# EAGLE board Board_OpenBook (EAGLE 9.7.0)
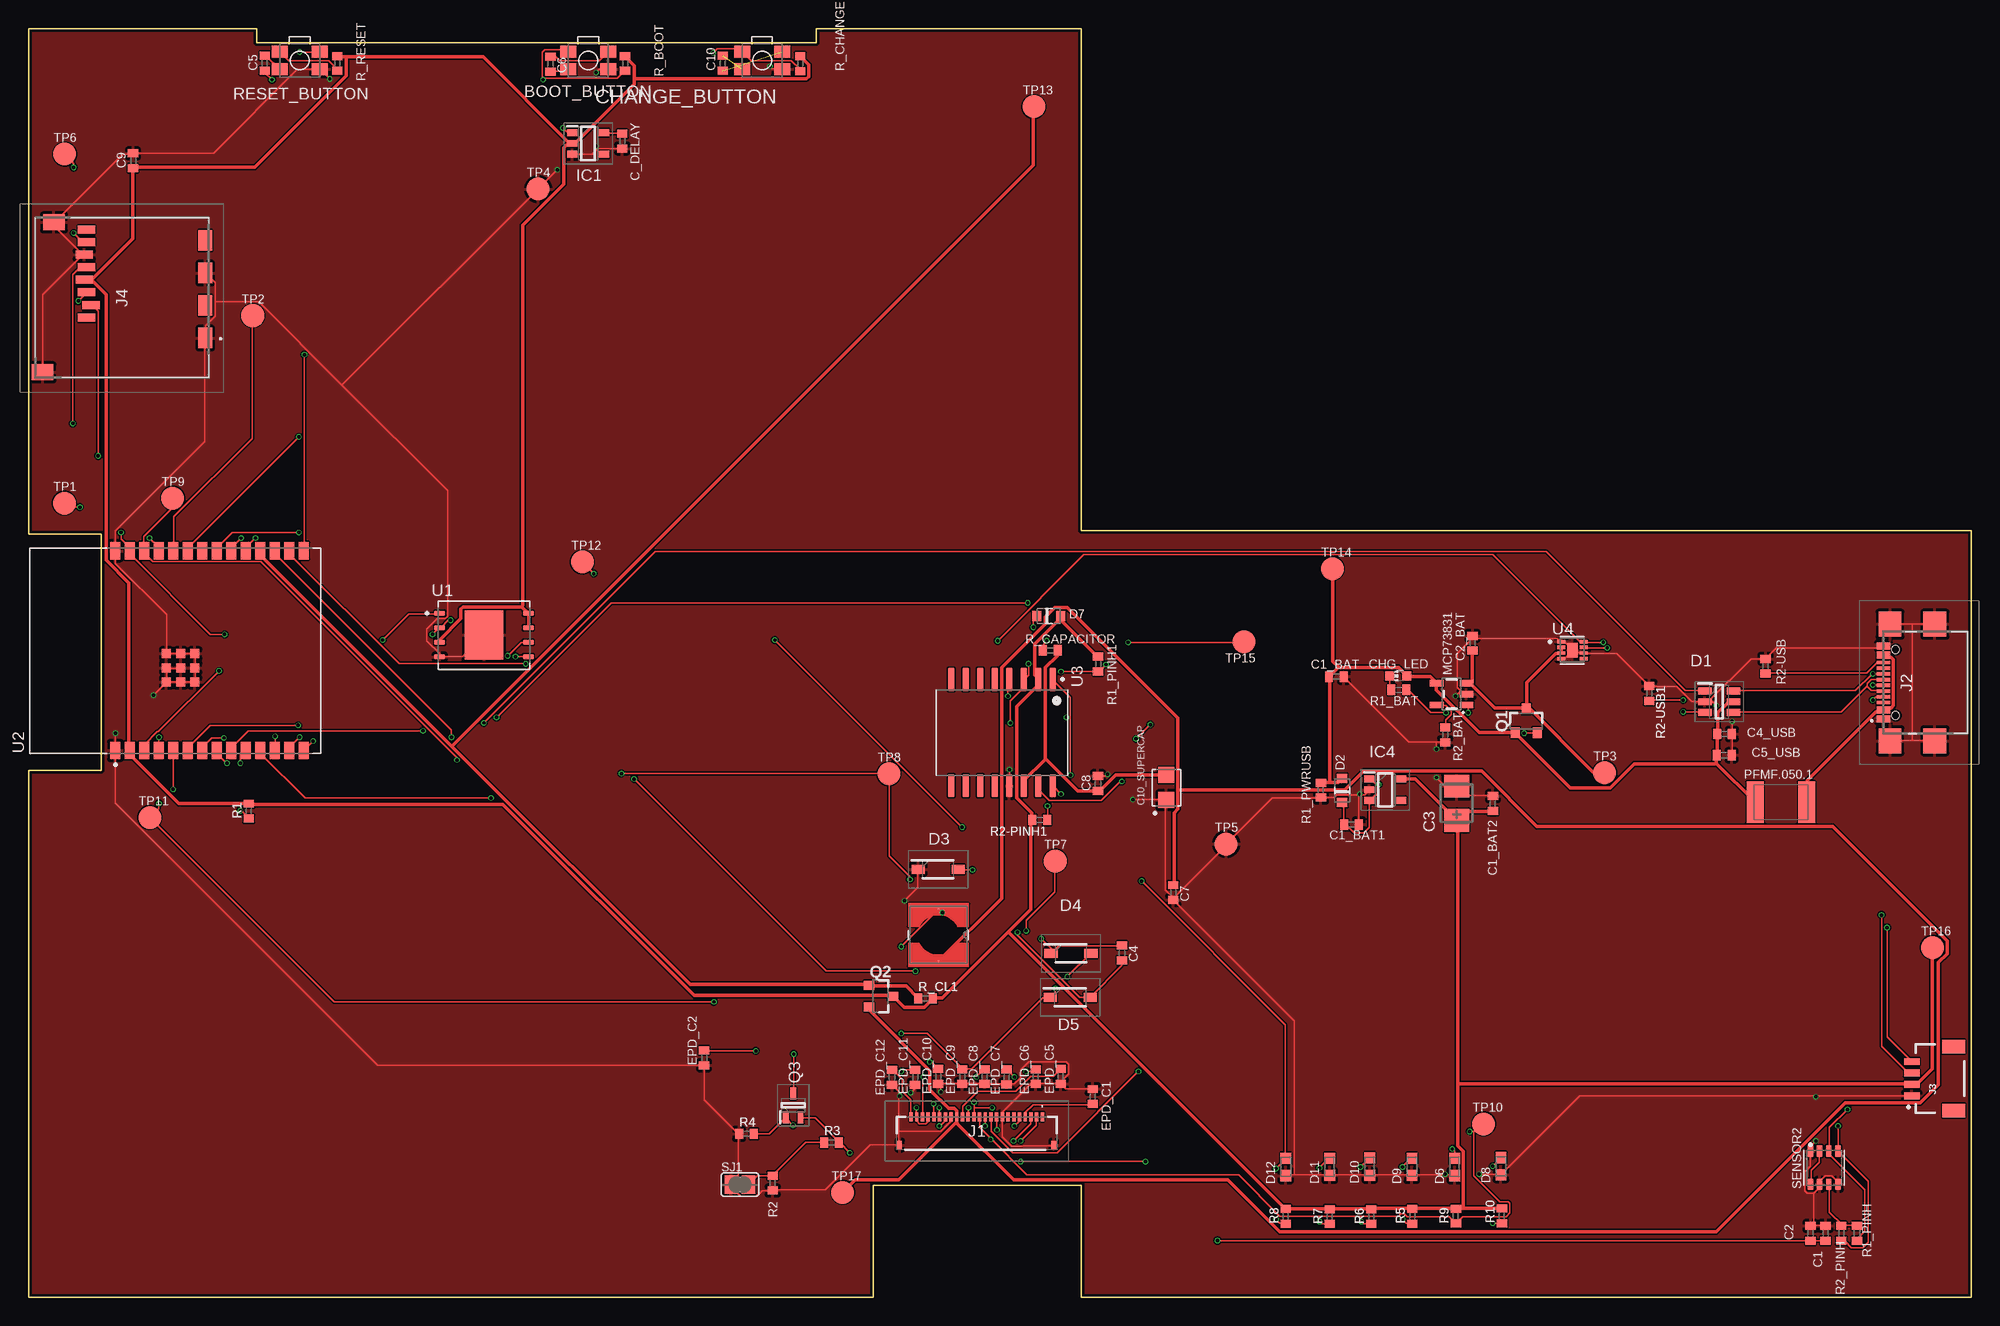
[diagram p0: board, top side]
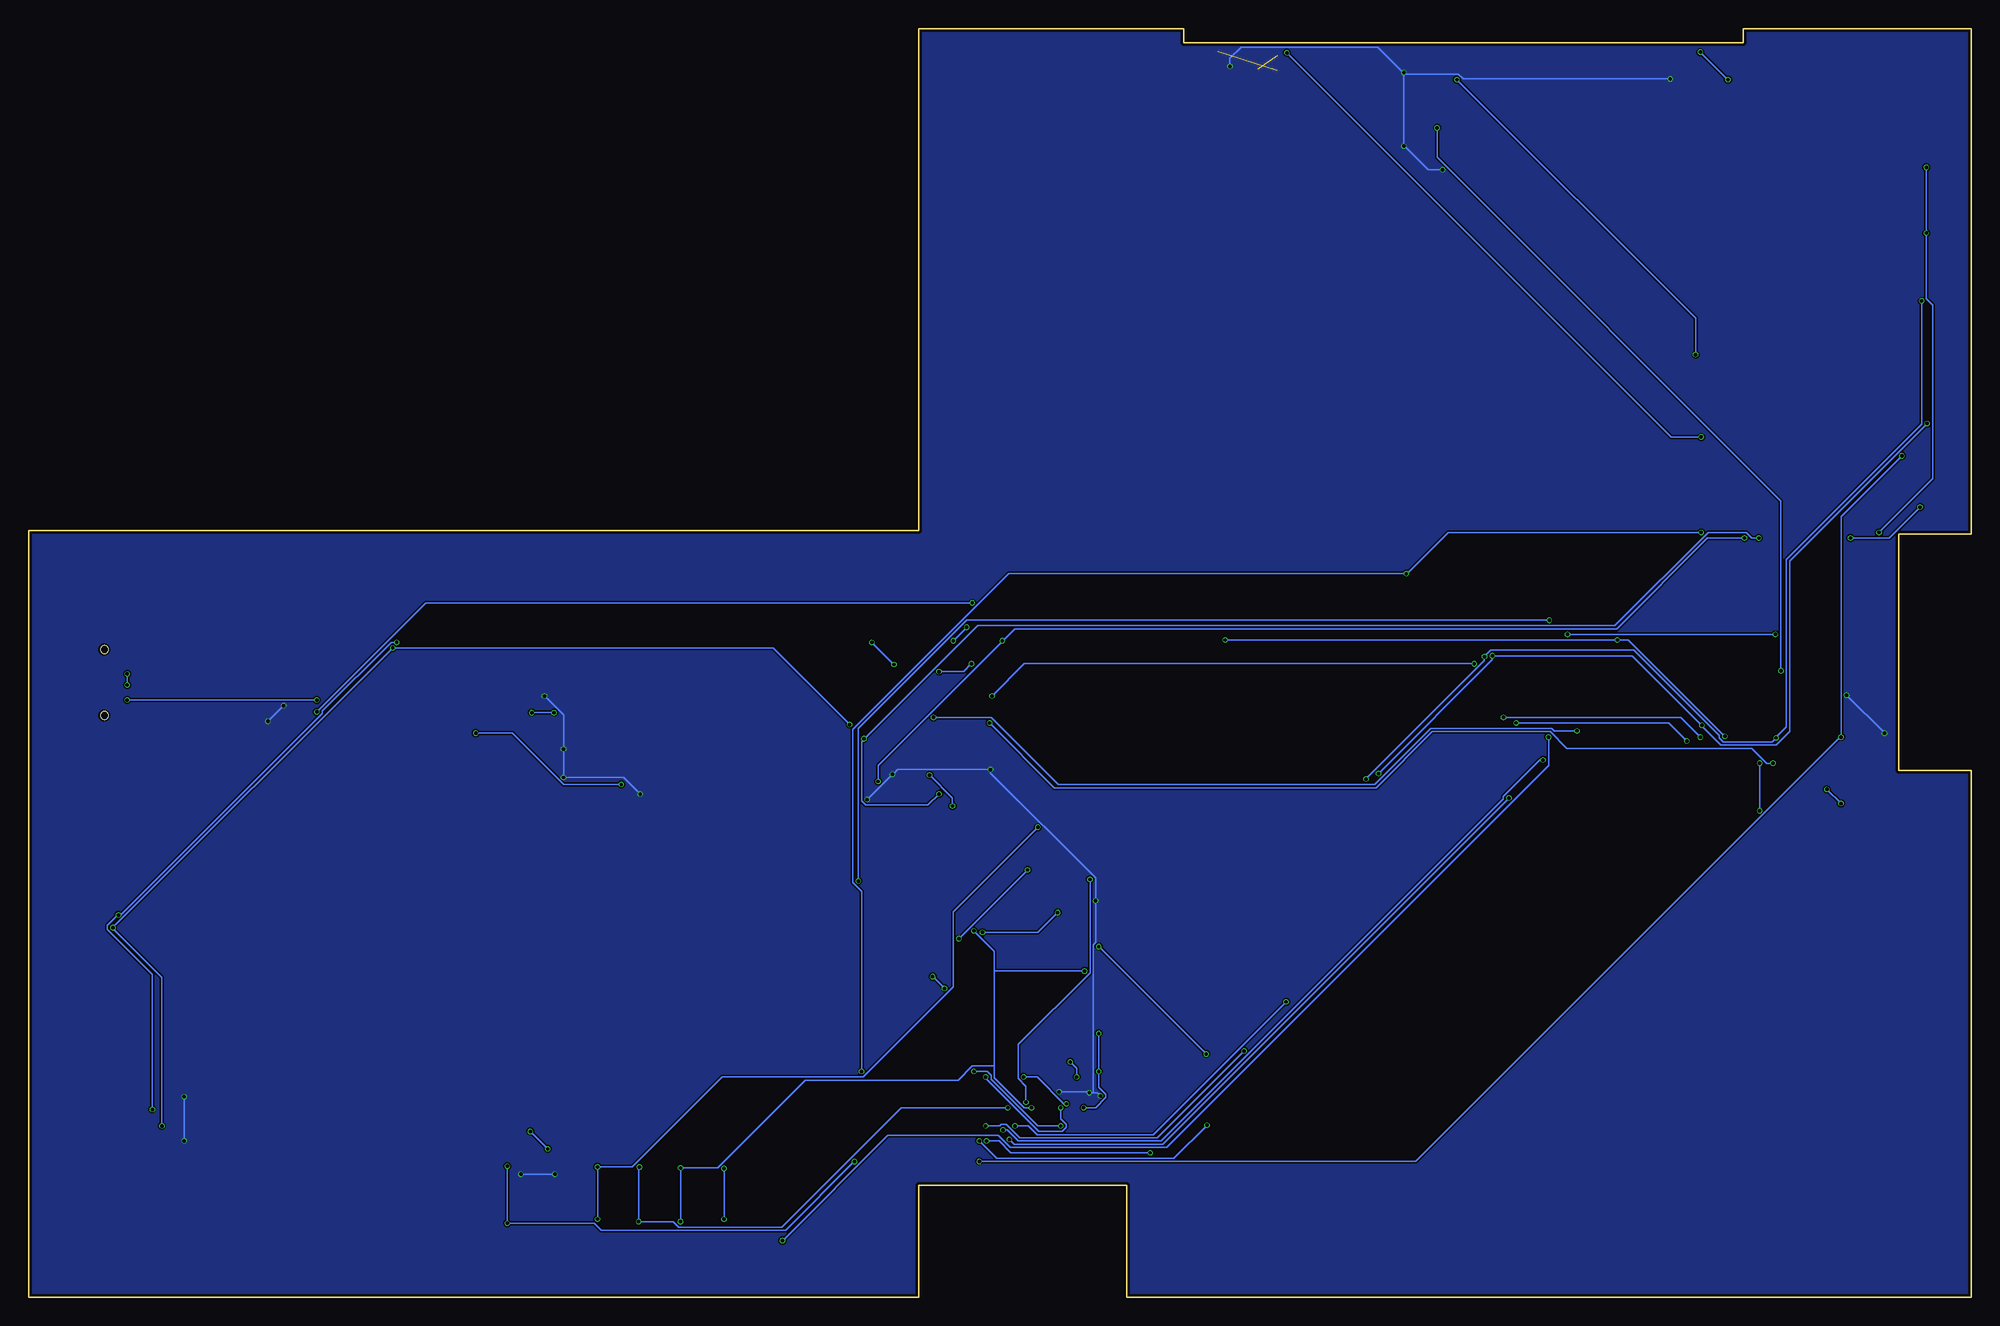
[diagram p1: board, bottom side, seen from below]

Size 170.2 x 111.2 mm. Coordinates in mm from the lower left corner, seen from the top.
Outline: 0,0 74,0 74,9.85 92.2,9.85 92.2,0 170.2,0 170.2,67.2 92.2,67.2 92.2,111.2 69.02,111.2 69.02,109.95 19.97,109.95 19.97,111.2 0,111.2 0,66.9 6.35,66.9 6.35,46.19 0,46.19 0,0
Copper layers (1*16): Top 0.035mm / dielectric 1.6mm / Bottom 0.035mm
Design rules "jlcpcb-2layers.dru": minimum track width 5mil, minimum drill 0.3mm, track to track 5mil, track to pad 5mil, pad to pad 5mil, via to via 5mil, smd to smd 5mil, copper to edge 0.2mm, drill to drill 6mil, minimum pad ring 10mil, minimum via ring 3mil, stop-mask expansion 4mil, vias tented up to drill 0mil, thermal gap 10mil
Net classes: 0 default: width 0.15 mm; 1 POWER: width 0.3 mm

## Footprints (pad centres in the part's own frame; a part is rotated, then mirrored left to right if it is on the bottom)
MYBUTTON = smd 1.4 x 1.05: 1 1.75,0.75; 2 -1.75,0.75; 3 -1.75,-0.75; 4 1.75,-0.75
ESP32_WROVER_EAGLE-LTSPICE_C0402 = smd 0.7 x 0.9: 1 -0.65,0; 2 0.65,0
RCL_CT3528 = smd 2 x 2.2: + -1.5,0; - 1.5,0
CAPCP3225X100N = smd 1.4 x 1.4: 1 -1.1,0; 2 1.1,0
ADAFRUIT_CHIP-LED0603 = smd 0.8 x 0.8: A 0,-0.75; C 0,0.75
SOT95P280X145-6N = smd 1.2 x 0.6: 1 -1.25,0.95; 2 -1.25,0; 3 -1.25,-0.95; 4 1.25,-0.95; 5 1.25,0; 6 1.25,0.95
ESP32_WROVER_AVX---SD0805S020S1R0_AVX_SD0805S020S1R0_0 = smd 0.8 x 0.9: 1 -1.05,0; 2 1.05,0
SOD3716X135N = smd 1.15 x 0.8: 1 -1.75,0; 2 1.75,0
DIOC1608X36N = smd 0.97 x 0.94: 1 -0.75,0; 2 0.75,0
SOT95P280X120-5N = smd 0.9 x 0.6: 1 -1.4,0.95; 2 -1.4,0; 3 -1.4,-0.95; 4 1.4,-0.95; 5 1.4,0.95
FH34SRJ24S05SH99 = smd 0.3 x 0.8: 1 5.75,1.45; 2 5.25,1.45; 3 4.75,1.45; 4 4.25,1.45; 5 3.75,1.45; 6 3.25,1.45; 7 2.75,1.45; 8 2.25,1.45; 9 1.75,1.45; 10 1.25,1.45; 11 0.75,1.45; 12 0.25,1.45; 13 -0.25,1.45; 14 -0.75,1.45; 15 -1.25,1.45; 16 -1.75,1.45; 17 -2.25,1.45; 18 -2.75,1.45; 19 -3.25,1.45; 20 -3.75,1.45; 21 -4.25,1.45; 22 -4.75,1.45; 23 -5.25,1.45; 24 -5.75,1.45 | smd 0.4 x 0.8: MP1 6.75,-1.05; MP2 -6.75,-1.05
SAMACSYS_PARTS_USB4110GFA = smd 0.3 x 1.15: A1 -3.35,3.678; A4 -2.55,3.678; A5 -1.25,3.678; A6 -0.25,3.678; A7 0.25,3.678; A8 1.25,3.678; A9 2.55,3.678; A12 3.35,3.678; B1 3.05,3.678; B4 2.25,3.678; B5 1.75,3.678; B6 0.75,3.678; B7 -0.75,3.678; B8 -1.75,3.678; B9 -2.25,3.678; B12 -3.05,3.678 | smd 2.18 x 2: MP1 -5.11,-0.827; MP2 5.11,-0.827; MP3 -5.11,3.103; MP4 5.11,3.103 | hole 0.65: -2.89,2.603; 2.89,2.603
JST04_1MM_RA = smd 0.6 x 1.35: 1 -1.5,0; 2 -0.5,0; 3 0.5,0; 4 1.5,0 | smd 1.2 x 2: NC1 2.8,-3.675; NC2 -2.8,-3.675
112ATAARR03ATTEND = smd 1.8 x 1.2: G1 10.6,10.4; G2 4.9,10.4; S1 7.75,10.4; S2 2.05,10.4 | smd 1.4 x 1.9: G3 13.6,-3.85; G4 0.45,-2.85 | smd 0.7 x 1.5: P1 8.8,0; P2 7.7,0.4; P3 6.6,0; P4 5.5,-0.2; P5 4.4,0; P6 3.3,-0.2; P7 2.2,0; P8 1.1,0
IND_4828-WE-TPC_WRE = smd 0.127 x 0.127: 1 -2.286,0; 2 2.286,0
ESP32_WROVER_SPARKFUN-IC-POWER_SOT23-5 = smd 0.55 x 1.2: 1 -0.95,-1.3; 2 0,-1.3; 3 0.95,-1.3; 4 0.95,1.3; 5 -0.95,1.3
ESP32C6_VARISTOR_CT/CN1812 = smd 1.5 x 3.6: 1 -2.25,0; 2 2.25,0
ESP32_WROVER_SPARKFUN-DISCRETESEMI_SOT23-3 = smd 0.8 x 0.9: 1 -0.95,-1; 2 0.95,-1; 3 0,1.1
SOT65P210X110-3N = smd 1.05 x 0.5: 1 -1.05,0.65; 2 -1.05,-0.65; 3 1.05,0
ESP32_WROVER_EAGLE-LTSPICE_R0402 = smd 0.7 x 0.9: 1 -0.65,0; 2 0.65,0
ESP32_WROVER_BME680_PSON80P300X300X100-8N = smd 1.016 x 0.5: 1 1.458,1.2; 2 1.458,0.4; 3 1.458,-0.4; 4 1.458,-1.2; 5 -1.458,-1.22; 6 -1.458,-0.4; 7 -1.458,0.4; 8 -1.458,1.2
SJ = smd 1.168 x 1.6: 1 -0.762,0; 2 0.762,0
TP20R = smd 2 x 2: TP 0,0
SON127P600X800X80-9N = smd 0.94 x 0.44: 1 -3.895,1.905; 2 -3.895,0.635; 3 -3.895,-0.635; 4 -3.895,-1.905; 5 3.895,-1.905; 6 3.895,-0.635; 7 3.895,0.635; 8 3.895,1.905 | smd 3.4 x 4.3: 9 0,0
XCVR_ESP32-C6-WROOM-1-N8 = smd 1.5 x 0.9: 1 -8.75,5.26; 2 -8.75,3.99; 3 -8.75,2.72; 4 -8.75,1.45; 5 -8.75,0.18; 6 -8.75,-1.09; 7 -8.75,-2.36; 8 -8.75,-3.63; 9 -8.75,-4.9; 10 -8.75,-6.17; 11 -8.75,-7.44; 12 -8.75,-8.71; 13 -8.75,-9.98; 14 -8.75,-11.25; 15 8.75,-11.25; 16 8.75,-9.98; 17 8.75,-8.71; 18 8.75,-7.44; 19 8.75,-6.17; 20 8.75,-4.9; 21 8.75,-3.63; 22 8.75,-2.36; 23 8.75,-1.09; 24 8.75,0.18; 25 8.75,1.45; 26 8.75,2.72; 27 8.75,3.99; 28 8.75,5.26 | smd 0.8 x 0.8: 29_1 -2.755,0.79; 29_2 -1.505,0.79; 29_3 -0.255,0.79; 29_4 -2.755,-0.46; 29_5 -1.505,-0.46; 29_6 -0.255,-0.46; 29_7 -2.755,-1.71; 29_8 -1.505,-1.71; 29_9 -0.255,-1.71
SOIC127P1032X265-16N = smd 2.05 x 0.59: 1 -4.655,4.445; 2 -4.655,3.175; 3 -4.655,1.905; 4 -4.655,0.635; 5 -4.655,-0.635; 6 -4.655,-1.905; 7 -4.655,-3.175; 8 -4.655,-4.445; 9 4.655,-4.445; 10 4.655,-3.175; 11 4.655,-1.905; 12 4.655,-0.635; 13 4.655,0.635; 14 4.655,1.905; 15 4.655,3.175; 16 4.655,4.445
SON50P200X200X80-9N = smd 0.76 x 0.27: 1 -0.985,0.75; 2 -0.985,0.25; 3 -0.985,-0.25; 4 -0.985,-0.75; 5 0.985,-0.75; 6 0.985,-0.25; 7 0.985,0.25; 8 0.985,0.75 | smd 0.9 x 1.3: 9 0,0

## Placement (x,y rotation side)
BOOT_BUTTON  BUTTON_CUSYOMV1  [MYBUTTON]  49.03,108.4 180 top
C1  100nF  [ESP32_WROVER_EAGLE-LTSPICE_C0402]  157.42,5.63 90 top
C1_BAT  4.7uF  [ESP32_WROVER_EAGLE-LTSPICE_C0402]  114.57,54.4 0 top
C1_BAT1  4.7uF  [ESP32_WROVER_EAGLE-LTSPICE_C0402]  115.89,41.44 0 top
C1_BAT2  4.7uF  [ESP32_WROVER_EAGLE-LTSPICE_C0402]  128.28,43.28 90 top
C2  100nF  [ESP32_WROVER_EAGLE-LTSPICE_C0402]  156.1,5.63 90 top
C2_BAT  4.7uF  [ESP32_WROVER_EAGLE-LTSPICE_C0402]  126.5,57.33 90 top
C3  100uF TANT  [RCL_CT3528]  125.1,43.31 90 top
C4  4.7uF/25V  [ESP32_WROVER_EAGLE-LTSPICE_C0402]  95.79,30.19 270 top
C4_USB  100nF  [ESP32_WROVER_EAGLE-LTSPICE_C0402]  148.57,49.37 0 top
C5  1uF  [ESP32_WROVER_EAGLE-LTSPICE_C0402]  20.69,108.16 90 top
C5_USB  4.7uF  [ESP32_WROVER_EAGLE-LTSPICE_C0402]  148.53,47.52 0 top
C6  100nF  [ESP32_WROVER_EAGLE-LTSPICE_C0402]  45.72,108.08 270 top
C7  10uF  [ESP32_WROVER_EAGLE-LTSPICE_C0402]  100.28,35.48 270 top
C8  100nF  [ESP32_WROVER_EAGLE-LTSPICE_C0402]  93.68,45.03 90 top
C9  100nF  [ESP32_WROVER_EAGLE-LTSPICE_C0402]  9.16,99.61 90 top
C10  100nF  [ESP32_WROVER_EAGLE-LTSPICE_C0402]  60.81,108.15 90 top
C10_SUPERCAP  CPH3225A  [CAPCP3225X100N]  99.68,44.68 90 top
C_DELAY  100nF  [ESP32_WROVER_EAGLE-LTSPICE_C0402]  52,101.33 270 top
CHANGE_BUTTON  BUTTON_CUSYOMV1  [MYBUTTON]  64.26,108.4 180 top
CHG_LED  [ADAFRUIT_CHIP-LED0603]  119.98,54.46 90 top
D1  USBLC6-2SC6Y  [SOT95P280X145-6N]  148.1,52.2 0 top
D2  ESP32_WROVER_AVX---SD0805S020S1R0_AVX_SD0805S020S1R0_0_0AVX_SD0805S020S1R0_0_0  [ESP32_WROVER_AVX---SD0805S020S1R0_AVX_SD0805S020S1R0_0]  115.07,44.43 90 top
D3  MBR0530  [SOD3716X135N]  79.68,37.51 0 top
D4  MBR0530  [SOD3716X135N]  91.32,30.16 0 top
D5  MBR0530  [SOD3716X135N]  91.25,26.29 0 top
D6  PGB1010603MR  [DIOC1608X36N]  124.93,11.43 90 top
D7  ESP32_WROVER_AVX---SD0805S020S1R0_AVX_SD0805S020S1R0_0_0AVX_SD0805S020S1R0_0_0  [ESP32_WROVER_AVX---SD0805S020S1R0_AVX_SD0805S020S1R0_0]  89.37,59.72 0 top
D8  PGB1010603MR  [DIOC1608X36N]  128.98,11.51 90 top
D9  PGB1010603MR  [DIOC1608X36N]  121.18,11.44 90 top
D10  PGB1010603MR  [DIOC1608X36N]  117.48,11.47 90 top
D11  PGB1010603MR  [DIOC1608X36N]  113.98,11.45 90 top
D12  PGB1010603MR  [DIOC1608X36N]  110.13,11.43 90 top
EPD_C1  1uF/50V  [ESP32_WROVER_EAGLE-LTSPICE_C0402]  93.22,17.61 270 top
EPD_C2  1uF/50V  [ESP32_WROVER_EAGLE-LTSPICE_C0402]  59.18,21 90 top
EPD_C5  0.1uF/50V  [ESP32_WROVER_EAGLE-LTSPICE_C0402]  90.42,19.38 90 top
EPD_C6  1uF/50V  [ESP32_WROVER_EAGLE-LTSPICE_C0402]  88.23,19.35 90 top
EPD_C7  1uF/50V  [ESP32_WROVER_EAGLE-LTSPICE_C0402]  85.68,19.32 90 top
EPD_C8  1uF/50V  [ESP32_WROVER_EAGLE-LTSPICE_C0402]  83.75,19.35 90 top
EPD_C9  1uF/50V  [ESP32_WROVER_EAGLE-LTSPICE_C0402]  81.8,19.36 90 top
EPD_C10  1uF/50V  [ESP32_WROVER_EAGLE-LTSPICE_C0402]  79.68,19.37 90 top
EPD_C11  1uF/50V  [ESP32_WROVER_EAGLE-LTSPICE_C0402]  77.66,19.3 90 top
EPD_C12  1uF/50V  [ESP32_WROVER_EAGLE-LTSPICE_C0402]  75.64,19.3 90 top
IC1  XC6220A331MR-G  [SOT95P280X120-5N]  49.02,101.13 0 top
IC4  XC6220A331MR-G  [SOT95P280X120-5N]  118.85,44.49 0 top
J1  FH34SRJ-24S-0.5SH_99_  [FH34SRJ24S05SH99]  83.06,14.39 0 top
J2  SAMACSYS_PARTS_USB4110-GF-A  [SAMACSYS_PARTS_USB4110GFA]  166.17,53.89 90 top
J3  QWIIC_RIGHT_ANGLE  [JST04_1MM_RA]  164.97,19.17 90 top
J4  112A-TAAR-R03_ATTEND  [112ATAARR03ATTEND]  5.08,94.68 270 top
L1  68uH  [IND_4828-WE-TPC_WRE]  79.71,31.77 270 top
MCP73831  ESP32_WROVER_SPARKFUN-IC-POWER_MCP73831  [ESP32_WROVER_SPARKFUN-IC-POWER_SOT23-5]  124.66,52.87 90 top
PFMF.050.1  ESP32C6_VARISTORCN1812  [ESP32C6_VARISTOR_CT/CN1812]  153.51,43.4 180 top
Q1  20V/4.2A/52mΩ/1.4W  [ESP32_WROVER_SPARKFUN-DISCRETESEMI_SOT23-3]  131.2,50.5 0 top
Q2  20V/4.2A/52mΩ/1.4W  [ESP32_WROVER_SPARKFUN-DISCRETESEMI_SOT23-3]  74.63,26.4 270 top
Q3  SI1308EDL-T1-GE3  [SOT65P210X110-3N]  66.98,16.83 90 top
R1  10K  [ESP32_WROVER_EAGLE-LTSPICE_R0402]  19.3,42.62 90 top
R1_BAT  200  [ESP32_WROVER_EAGLE-LTSPICE_R0402]  120.04,53.25 0 top
R1_PINH  10K  [ESP32_WROVER_EAGLE-LTSPICE_R0402]  160.17,5.62 90 top
R1_PINH1  10K  [ESP32_WROVER_EAGLE-LTSPICE_R0402]  93.69,55.51 90 top
R1_PWRUSB  100K  [ESP32_WROVER_EAGLE-LTSPICE_R0402]  113.21,44.45 90 top
R2  2.2  [ESP32_WROVER_EAGLE-LTSPICE_R0402]  65.19,10.02 90 top
R2-PINH1  10K  [ESP32_WROVER_EAGLE-LTSPICE_R0402]  88.58,41.85 180 top
R2-USB  5k1  [ESP32_WROVER_EAGLE-LTSPICE_R0402]  152.16,55.31 90 top
R2-USB1  5k1  [ESP32_WROVER_EAGLE-LTSPICE_R0402]  141.97,52.94 270 top
R2_BAT  2K  [ESP32_WROVER_EAGLE-LTSPICE_R0402]  124.1,49.3 90 top
R2_PINH  10K  [ESP32_WROVER_EAGLE-LTSPICE_R0402]  158.8,5.62 90 top
R3  0.47  [ESP32_WROVER_EAGLE-LTSPICE_R0402]  70.34,13.58 0 top
R4  10K  [ESP32_WROVER_EAGLE-LTSPICE_R0402]  62.9,14.33 0 top
R5  10K  [ESP32_WROVER_EAGLE-LTSPICE_R0402]  121.22,7.12 90 top
R6  10K  [ESP32_WROVER_EAGLE-LTSPICE_R0402]  117.62,7.09 90 top
R7  10K  [ESP32_WROVER_EAGLE-LTSPICE_R0402]  113.99,7.09 90 top
R8  10K  [ESP32_WROVER_EAGLE-LTSPICE_R0402]  110.14,7.11 90 top
R9  10K  [ESP32_WROVER_EAGLE-LTSPICE_R0402]  125.04,7.13 90 top
R10  10K  [ESP32_WROVER_EAGLE-LTSPICE_R0402]  129.07,7.16 90 top
R_BOOT  10K  [ESP32_WROVER_EAGLE-LTSPICE_R0402]  52.26,108.14 90 top
R_CAPACITOR  15  [ESP32_WROVER_EAGLE-LTSPICE_R0402]  89.5,56.71 0 top
R_CHANGE  10K  [ESP32_WROVER_EAGLE-LTSPICE_R0402]  67.61,108.12 90 top
R_CL1  10K  [ESP32_WROVER_EAGLE-LTSPICE_R0402]  78.58,26.2 0 top
R_RESET  10K  [ESP32_WROVER_EAGLE-LTSPICE_R0402]  27.05,108.14 90 top
RESET_BUTTON  BUTTON_CUSYOMV1  [MYBUTTON]  23.76,108.4 180 top
SENSOR2  BME688  [ESP32_WROVER_BME680_PSON80P300X300X100-8N]  157.3,11.37 90 top
SJ1  [SJ]  62.32,9.89 0 top
TP1  TPTP20R  [TP20R]  3.14,69.61 0 top
TP2  TPTP20R  [TP20R]  19.64,86.04 0 top
TP3  TPTP20R  [TP20R]  138.06,45.99 0 top
TP4  TPTP20R  [TP20R]  44.63,97.14 0 top
TP5  TPTP20R  [TP20R]  104.9,39.74 0 top
TP6  TPTP20R  [TP20R]  3.17,100.19 0 top
TP7  TPTP20R  [TP20R]  89.94,38.24 0 top
TP8  TPTP20R  [TP20R]  75.36,45.89 0 top
TP9  TPTP20R  [TP20R]  12.63,70.04 0 top
TP10  TPTP20R  [TP20R]  127.47,15.21 0 top
TP11  TPTP20R  [TP20R]  10.62,42.06 0 top
TP12  TPTP20R  [TP20R]  48.52,64.46 0 top
TP13  TPTP20R  [TP20R]  88.07,104.36 0 top
TP14  TPTP20R  [TP20R]  114.22,63.86 0 top
TP15  TPTP20R  [TP20R]  106.48,57.44 180 top
TP16  TPTP20R  [TP20R]  166.77,30.66 0 top
TP17  TPTP20R  [TP20R]  71.32,9.2 0 top
U1  W25Q512JVEIQ  [SON127P600X800X80-9N]  39.9,58.05 0 top
U2  ESP32-C6-WROOM-1-N8  [XCVR_ESP32-C6-WROOM-1-N8]  12.86,56.68 90 top
U3  DS3231SN#  [SOIC127P1032X265-16N]  85.28,49.49 270 top
U4  MAX17048G+T10  [SON50P200X200X80-9N]  135.24,56.72 0 top

## Library data of the parts
BOOT_BUTTON CHANGE_BUTTON CHG_LED PFMF.050.1 RESET_BUTTON SJ1 TP1-TP17 = DeskAssistant v19 v1
C1 C1_BAT C1_BAT1 C1_BAT2 C2 C2_BAT C4 C4_USB C5 C5_USB C6-C10 C_DELAY EPD_C1 EPD_C2 EPD_C5-EPD_C12 = DeskAssistant v19 v1; SPICEMODEL: NONE; SPICEPREFIX: C
C3 = DeskAssistant v19 v1; SPICEPREFIX: C
C10_SUPERCAP = DeskAssistant v19 v1; AVAILABILITY: Not in stock; CHECK_PRICES: https://www.snapeda.com/parts/CPH3225A/Seiko+Instruments/view-part/?ref=eda; DESCRIPTION: 11 mF (EDLC) Supercapacitor 3.3 V 1210 (3225 Metric) - -; MF: Seiko Instruments; MP: CPH3225A; PACKAGE: 1210 Seiko; PRICE: None; PURCHASE-URL: https://www.snapeda.com/api/url_track_click_mouser/?unipart_id=562593&manufacturer=Seiko Instruments&part_name=CPH3225A&search_term=None; SNAPEDA_LINK: https://www.snapeda.com/parts/CPH3225A/Seiko+Instruments/view-part/?ref=snap
D1 = DeskAssistant v19 v1; AVAILABILITY: In Stock; CHECK_PRICES: https://www.snapeda.com/parts/USBLC6-2SC6Y/STMicroelectronics/view-part/?ref=eda; DESCRIPTION: 17V Clamp 5A (8/20µs) Ipp Tvs Diode Surface Mount SOT-23-6; MF: STMicroelectronics; MP: USBLC6-2SC6Y; PACKAGE: SOT-23-6 STMicroelectronics; PRICE: None; SNAPEDA_LINK: https://www.snapeda.com/parts/USBLC6-2SC6Y/STMicroelectronics/view-part/?ref=snap
D2 D7 = DeskAssistant v19 v1; CENTROID_NOT_SPECIFIED: No; DATASHEET: http://datasheets.avx.com/schottky.pdf; DIGIKEY_DESCRIPTION: DIODE SCHOTTKY 20V 1A 0805; DIGIKEY_PART_NUMBER: 478-7800-1-ND; LEAD_FREE: yes; MF: AVX; MOUSER_PART_NUMBER: 581-SD0805S020S1R0; PACKAGE: 0805 (2012 metric); PREFIX: D; ROHS: yes; TEMPERATURE_RANGE_HIGH: +125°C; TEMPERATURE_RANGE_LOW: -55°C
D3-D5 = DeskAssistant v19 v1; AVAILABILITY: In Stock; CHECK_PRICES: https://www.snapeda.com/parts/MBR0530/Onsemi/view-part/?ref=eda; DESCRIPTION: Diode Schottky 30 V 500mA Surface Mount SOD-123; MF: ON Semiconductor; MP: MBR0530; PACKAGE: SOD-123-2 ON Semiconductor; PRICE: None; PURCHASE-URL: https://www.snapeda.com/api/url_track_click_mouser/?unipart_id=179458&manufacturer=ON Semiconductor&part_name=MBR0530&search_term=None; SNAPEDA_LINK: https://www.snapeda.com/parts/MBR0530/Onsemi/view-part/?ref=snap
D6 D8-D12 = DeskAssistant v19 v1; AVAILABILITY: In Stock; CHECK_PRICES: https://www.snapeda.com/parts/PGB1010603MR/Littelfuse/view-part/?ref=eda; DESCRIPTION: 150V (Typ) Clamp - Ipp Tvs Diode Surface Mount 0603 (1608 Metric); MF: Littelfuse Inc.; MP: PGB1010603MR; PACKAGE: 0603 Littelfuse Inc.; PRICE: None; PURCHASE-URL: https://www.snapeda.com/api/url_track_click_mouser/?unipart_id=5659453&manufacturer=Littelfuse Inc.&part_name=PGB1010603MR&search_term=None; SNAPEDA_LINK: https://www.snapeda.com/parts/PGB1010603MR/Littelfuse/view-part/?ref=snap
IC1 = DeskAssistant v19 v1; DESCRIPTION: LDO Voltage Regulators; HEIGHT: 1.2mm; MANUFACTURER_NAME: Torex; MANUFACTURER_PART_NUMBER: BD5229G-TR; MOUSER_PART_NUMBER: 865-XC6220A331MR-G; MOUSER_PRICE-STOCK: https://www.mouser.co.uk/ProductDetail/Torex-Semiconductor/XC6220A331MR-G?qs=AsjdqWjXhJ8ZSWznL1J0gg%3D%3D
IC4 = DeskAssistant v19 v1; DESCRIPTION: LDO Voltage Regulators; HEIGHT: 1.2mm; MANUFACTURER_NAME: Torex; MANUFACTURER_PART_NUMBER: XC6220A331MR-G; MOUSER_PART_NUMBER: 865-XC6220A331MR-G; MOUSER_PRICE-STOCK: https://www.mouser.co.uk/ProductDetail/Torex-Semiconductor/XC6220A331MR-G?qs=AsjdqWjXhJ8ZSWznL1J0gg%3D%3D
J1 = DeskAssistant v19 v1; DESCRIPTION: 24 Position FFC, FPC Connector Contacts, Top and Bottom 0.020" (0.50mm) Surface Mount, Right Angle; HEIGHT: 1.1mm; MANUFACTURER_NAME: Hirose; MANUFACTURER_PART_NUMBER: FH34SRJ-24S-0.5SH(99); MOUSER_PART_NUMBER: 798-FH34SRJ24S05SH99; MOUSER_PRICE-STOCK: https://www.mouser.co.uk/ProductDetail/Hirose-Connector/FH34SRJ-24S-0.5SH99?qs=vcbW%252B4%252BSTIpKBl5ap9J8Fw%3D%3D
J2 = DeskAssistant v19 v1; DESCRIPTION: CONN USB 2.0 TYPE-C R/A SMT; HEIGHT: 3.26mm; MANUFACTURER_NAME: GCT (GLOBAL CONNECTOR TECHNOLOGY); MANUFACTURER_PART_NUMBER: USB4110-GF-A; MOUSER_PART_NUMBER: 640-USB4110-GF-A; MOUSER_PRICE-STOCK: https://www.mouser.co.uk/ProductDetail/GCT/USB4110-GF-A?qs=KUoIvG%2F9IlYiZvIXQjyJeA%3D%3D
J3 = DeskAssistant v19 v1; PROD_ID: CONN-13694
J4 = DeskAssistant v19 v1; DESCRIPTION: Micro SD Card Socket, Push-Push Type, Top Mount, SMT, H=1.83mm, 10u; HEIGHT: 1.9mm; MANUFACTURER_NAME: ATTEND; MANUFACTURER_PART_NUMBER: 112A-TAAR-R03 ATTEND
L1 = DeskAssistant v19 v1; COPYRIGHT: Copyright (C) 2024 Ultra Librarian. All rights reserved.; MANUFACTURER_PART_NUMBER: 744043680; MFR_NAME: Wurth Electronics
MCP73831 = DeskAssistant v19 v1; PROD_ID: IC-09995
Q1 Q2 = DeskAssistant v19 v1; PROD_ID: TRAN-14388
Q3 = DeskAssistant v19 v1; AVAILABILITY: In Stock; CHECK_PRICES: https://www.snapeda.com/parts/SI1308EDL-T1-GE3/Vishay+Siliconix/view-part/?ref=eda; DESCRIPTION: Si1308EDL-T1-GE3 N-channel MOSFET Transistor, 1.5 A, 30 V, 3-Pin SC-70 | Siliconix / Vishay SI1308EDL-T1-GE3; MF: Vishay Siliconix; MP: SI1308EDL-T1-GE3; PACKAGE: SOT-323 Vishay Semiconductor; PRICE: None; PURCHASE-URL: https://www.snapeda.com/api/url_track_click_mouser/?unipart_id=274603&manufacturer=Vishay Siliconix&part_name=SI1308EDL-T1-GE3&search_term=None; SNAPEDA_LINK: https://www.snapeda.com/parts/SI1308EDL-T1-GE3/Vishay+Siliconix/view-part/?ref=snap
R1 R1_BAT R1_PINH R1_PINH1 R1_PWRUSB R2 R2-PINH1 R2-USB R2-USB1 R2_BAT R2_PINH R3-R10 R_BOOT R_CAPACITOR R_CHANGE R_CL1 R_RESET = DeskAssistant v19 v1; SPICEMODEL: NONE; SPICEPREFIX: R
SENSOR2 = DeskAssistant v19 v1; AVAILABILITY: Unavailable; DESCRIPTION: Integrated Environmental Unit; MF: Bosch Sensortec; MP: BME680; PACKAGE: LGA-8 Bosch Tools; PRICE: None
U1 = DeskAssistant v19 v1; AVAILABILITY: In Stock; CHECK_PRICES: https://www.snapeda.com/parts/W25Q512JVEIQ/Winbond+Electronics/view-part/?ref=eda; DESCRIPTION: FLASH - NOR Memory IC 512Mb (64M x 8) SPI - Quad I/O 133 MHz 8-WSON (8x6); MF: Winbond Electronics; MP: W25Q512JVEIQ; PACKAGE: Package; PRICE: None; SNAPEDA_LINK: https://www.snapeda.com/parts/W25Q512JVEIQ/Winbond+Electronics/view-part/?ref=snap
U2 = DeskAssistant v19 v1; AVAILABILITY: In Stock; CHECK_PRICES: https://www.snapeda.com/parts/ESP32-C6-WROOM-1-N8/Espressif+Systems/view-part/?ref=eda; DESCRIPTION: Multiprotocol Modules ESP32-C6 module, Wi-Fi 6 in 2.4 GHz band, Bluetooth 5, Zigbee 3.0 and Thread. ESP34-WROOM Compatible - ENGINEERING SAMPLE; MF: Espressif Systems; MP: ESP32-C6-WROOM-1-N8; PACKAGE: None; PRICE: None; SNAPEDA_LINK: https://www.snapeda.com/parts/ESP32-C6-WROOM-1-N8/Espressif+Systems/view-part/?ref=snap
U3 = DeskAssistant v19 v1; AVAILABILITY: In Stock; CHECK_PRICES: https://www.snapeda.com/parts/DS3231SN%23/Analog+Devices/view-part/?ref=eda; DESCRIPTION: Extremely Accurate I²C-Integrated RTC/TCXO/Crystal; MF: Analog Devices; MP: DS3231SN#; PACKAGE: SOIC-16 Maxim; PRICE: None; PURCHASE-URL: https://www.snapeda.com/api/url_track_click_mouser/?unipart_id=99048&manufacturer=Analog Devices&part_name=DS3231SN#&search_term=None; SNAPEDA_LINK: https://www.snapeda.com/parts/DS3231SN%23/Analog+Devices/view-part/?ref=snap
U4 = DeskAssistant v19 v1; AVAILABILITY: In Stock; CHECK_PRICES: https://www.snapeda.com/parts/MAX17048G+T10/Analog+Devices/view-part/?ref=eda; DESCRIPTION: 3µA 1-Cell/2-Cell Fuel Gauge with ModelGauge; MF: Analog Devices; MP: MAX17048G+T10; PACKAGE: TDFN-8 Maxim; PRICE: None; PURCHASE-URL: https://www.snapeda.com/api/url_track_click_mouser/?unipart_id=329239&manufacturer=Analog Devices&part_name=MAX17048G+T10&search_term=None; SNAPEDA_LINK: https://www.snapeda.com/parts/MAX17048G+T10/Analog+Devices/view-part/?ref=snap

## Nets
3V3 [POWER]: C1_BAT2.1 C3.+ C9.1 D7.2 IC1.2 IC4.5 J3.2 J4.P4 Q2.3 R1.2 R1_PINH1.2 R2-PINH1.2 R5.2 R6.2 R7.2 R8.2 R9.2 R10.2 R_BOOT.2 R_CHANGE.2 R_CL1.2 R_RESET.2 TP16.TP U1.3 U1.7 U1.8 U2.2 U3.2
32KHZ: R2-PINH1.1 U2.9 U3.1
DN: D1.4 J2.A7 J2.B7
DP: D1.6 J2.A6 J2.B6
EPD_3V3 [POWER]: C7.1 J1.16 L1.2 Q2.2 TP17.TP
EPD_3V3_C [POWER]: Q2.1 R_CL1.1 TP13.TP U2.18
EPD_BUSY: J1.9 TP9.TP U2.26
EPD_CS: D6.2 J1.12 R9.1 TP10.TP U2.11
EPD_DC: J1.11 TP11.TP U2.5
EPD_RST: J1.10 TP12.TP U2.21
FLASH_CS: D9.2 R5.1 U1.1 U2.12
GDR: J1.2 Q3.1 R4.2
GND: BOOT_BUTTON.2 C1.2 C1_BAT1.2 C1_BAT2.2 C1_BAT.2 C2.2 C2_BAT.2 C3.- C4_USB.2 C5_USB.2 C7.2 C8.2 C9.2 C10_SUPERCAP.1 C_DELAY.2 CHANGE_BUTTON.2 D1.2 D3.1 D6.1 D8.1 D9.1 D10.1 D11.1 D12.1 EPD_C1.1 EPD_C2.1 EPD_C5.1 EPD_C6.1 EPD_C7.1 EPD_C8.1 EPD_C9.1 EPD_C10.1 EPD_C11.1 EPD_C12.1 IC1.3 IC4.2 J1.8 J1.17 J1.MP1 J1.MP2 J2.A1 J2.A12 J2.B1 J2.B12 J2.MP1 J2.MP2 J2.MP3 J2.MP4 J3.1 J4.G1 J4.G2 J4.G3 J4.G4 J4.P6 MCP73831.2 R1_PWRUSB.1 R2-USB1.1 R2-USB.2 R2.1 R2_BAT.1 R4.1 RESET_BUTTON.2 SENSOR2.1 SENSOR2.5 SENSOR2.7 SJ1.1 TP4.TP TP5.TP U1.4 U1.9 U2.1 U2.28 U2.29_1 U2.29_2 U2.29_3 U2.29_4 U2.29_5 U2.29_6 U2.29_7 U2.29_8 U2.29_9 U3.13 U4.1 U4.4 U4.6 U4.9
GPIO8: R1.1 U2.10
I2C_PW: C1.1 C2.1 U2.17
IC2_PW: R1_PINH.2 R2_PINH.2 SENSOR2.6
INT_RTC: R1_PINH1.1 TP15.TP U2.8 U3.3
IO/BOOT: BOOT_BUTTON.4 R_BOOT.1 U2.15
IO/CHANGE: CHANGE_BUTTON.4 R_CHANGE.1 U2.23
MISO: D12.2 J4.P7 R8.1 TP6.TP U1.2 U2.27
MOSI: D11.2 J1.14 J4.P3 R7.1 TP7.TP U1.5 U2.7
N$1: J2.B5 R2-USB.1
N$2: J2.A5 R2-USB1.2
N$3: C1_BAT1.1 D2.1 IC4.1 IC4.3 Q1.2
N$4: C10.1 CHANGE_BUTTON.3
N$5: C4.1 D3.2 D4.1
N$6: C10.2 CHANGE_BUTTON.1
N$7: SENSOR2.2 SENSOR2.8
N$8: MCP73831.5 R2_BAT.2
N$9: EPD_C12.2 J1.24
N$10: MCP73831.1 R1_BAT.2
N$11: CHG_LED.C R1_BAT.1
N$12: C_DELAY.1 IC1.5
N$13: EPD_C10.2 J1.22
N$14: D7.1 R_CAPACITOR.1
N$15: EPD_C8.2 J1.20
N$16: EPD_C7.2 J1.19
N$18: R_RESET.1 RESET_BUTTON.4
N$19: EPD_C6.2 J1.18
N$20: EPD_C1.2 J1.4
N$21: EPD_C5.2 J1.15
N$22: EPD_C2.2 J1.5
N$23: BOOT_BUTTON.1 C6.2
N$24: C5.2 RESET_BUTTON.1
N$25: BOOT_BUTTON.3 C6.1
N$26: C5.1 RESET_BUTTON.3
PREVGL: D4.2 D5.1 EPD_C9.2 EPD_C11.2 J1.21 J1.23
RESE: J1.3 Q3.2 R3.2
RESE': R2.2 R3.1 SJ1.2
RESET: IC1.1 U2.3
RTC_RST: U2.16 U3.4
RX: TP2.TP U2.24
SCK: D10.2 J1.13 J4.P5 R6.1 TP8.TP U1.6 U2.6
SCL: J3.4 R2_PINH.1 SENSOR2.4 U2.20 U3.16 U4.7
SDA: J3.3 R1_PINH.1 SENSOR2.3 U2.19 U3.15 U4.8
SRC: C4.2 D5.2 L1.1 Q3.3
SS_SD: D8.2 J4.P2 R10.1 U2.4
TX: TP1.TP U2.25
USB_D+: D1.1 U2.14
USB_D-: D1.3 U2.13
VBAT [POWER]: C2_BAT.1 MCP73831.3 Q1.3 TP3.TP U4.2 U4.3
VBUS [POWER]: C1_BAT.1 C4_USB.1 C5_USB.1 CHG_LED.A D1.5 D2.2 MCP73831.4 PFMF.050.1.2 Q1.1 R1_PWRUSB.2 TP14.TP
VRTC [POWER]: C8.1 C10_SUPERCAP.2 R_CAPACITOR.2 U3.14
VUSB [POWER]: J2.A4 J2.A9 J2.B4 J2.B9 PFMF.050.1.1

## Tracks (layer width: path | path; a pad name or v marks a point on that pad's centre or on a via)
3V3
  Top 0.3: 43.21,60.53 38.09,60.53 37.88,60.32 37.88,59.49 36.01,57.62 36.01,57.48 U1.3 | 43.21,60.53 43.77,59.97 U1.8 43.84,59.83 43.84,58.73 U1.7 | 53.05,106.78 53.05,107.96 52.28,108.72 R_BOOT.2 | 53.05,106.78 53.05,106.3 47.92,101.17 47.64,101.17 IC1.2 | 27.84,108.72 39.82,108.72 47.3,101.25 47.51,101.25 IC1.2 | 27.84,108.72 27.08,108.72 R_RESET.2 | 53.05,106.78 68.14,106.78 68.35,106.99 68.35,108.03 67.66,108.72 R_CHANGE.2 | 43.21,60.53 43.28,60.66 43.28,93.97 46.88,97.57 46.88,100.76 47.23,101.11 IC1.2 | 27.84,108.72 27.84,107.06 19.8,99.03 9.28,99.03 C9.1 9.14,98.96 9.14,92.8 5.54,89.19 4.92,89.19 J4.P4 5.61,89.06 6.79,87.88 6.79,64.61 8.79,62.6 8.79,48.06 U2.2 8.93,47.92 8.93,47.51 13.16,43.28 19.25,43.28 R1.2 19.39,43.21 41.55,43.21 58.31,26.45 75.62,26.45 Q2.3 75.76,26.39 76.73,25.42 78.46,25.42 79.22,26.18 R_CL1.2 79.36,26.25 80.05,26.25 85.83,32.03 | R1_PINH1.2 93.63,56.16 90.44,59.35 90.44,59.69 D7.2 90.3,59.28 90.16,59.28 88.16,57.27 88.16,54.57 88.43,54.29 U3.2 88.43,54.09 88.43,53.67 86.56,51.8 86.56,43.77 87.88,42.45 87.88,41.9 R2-PINH1.2 87.81,41.76 87.81,34 85.83,32.03 | TP16.TP 166.75,30.61 166.75,20.01 165.44,18.7 165.02,18.7 J3.2 164.88,18.7 125.2,18.7 | IC4.5 120.29,45.43 121.47,45.43 125.07,41.83 C3.+ | C1_BAT2.1 128.25,42.59 125.9,42.59 125.2,41.9 C3.+ | 125.69,7.83 125.14,7.83 R9.2 125,7.83 121.33,7.83 R5.2 121.19,7.83 117.72,7.83 R6.2 117.59,7.76 114.12,7.76 R7.2 113.99,7.76 110.18,7.76 R8.2 110.04,7.83 85.83,32.03 | 125.69,7.83 129.01,7.83 R10.2 | 125.2,18.7 125.2,13.3 125.69,12.81 125.69,7.83 | 125.2,18.7 125.2,41.69 C3.+
32KHZ  (via drill 0.3)
  Top 0.15: v89.26,43.08 89.26,41.9 R2-PINH1.1 | 91.27,50.83 91.27,52.56 89.75,54.09 U3.1 | 91.27,50.83 v91.27,45.77 | v34.56,49.65 19.25,49.65 17.8,48.2 17.8,47.99 U2.9 | 91.27,50.83 v90.92,50.83
  Bottom 0.15: v89.26,43.08 89.26,43.77 v91.27,45.77 | v34.56,49.65 36.56,49.65 36.77,49.86 47.37,49.86 52.28,44.94 79.98,44.94 85.87,50.83 v90.92,50.83
DN
  Top 0.15: 161.08,53.53 161.42,53.19 162.46,53.19 J2.B7 | 161.08,53.53 161.08,53.81 161.42,54.15 162.46,54.15 J2.A7 | D1.4 149.37,51.31 158.79,51.31 161.01,53.53 161.08,53.53
DP  (via drill 0.3)
  Top 0.15: v161.56,53.67 162.46,53.67 J2.A6 | J2.B6 162.46,54.64 v161.56,54.64 161.49,54.64 160.04,53.19 149.37,53.19 D1.6
  Bottom 0.15: v161.56,54.64 v161.56,53.67
EPD_3V3
  Top 0.3: 81.3,15.38 81.3,15.79 J1.16 81.3,15.93 81.3,16.34 81.09,16.55 80.61,16.55 78.94,18.21 78.94,19.88 73.68,25.14 73.68,25.42 Q2.2 | 81.3,15.38 76.24,10.32 72.44,10.32 71.33,9.21 TP17.TP | 100.69,44.46 100.69,50.76 91,60.46 89.89,60.46 89.06,59.62 89.06,59 85.25,55.19 85.25,34.97 79.71,29.43 L1.2 | 100.69,44.46 100.69,42.8 100.34,42.45 100.34,36.15 C7.1 | 100.69,44.46 115.3,44.46 116.96,46.12 127.28,46.12 132.13,41.27 158.03,41.27 168.07,31.23 168.07,30.12 167.31,29.36 167.31,18.63 165.72,17.04 159.14,17.04 147.85,5.75 109.62,5.75 105.05,10.32 86.28,10.32 81.37,15.24 81.3,15.38
EPD_3V3_C
  Top 0.3: R_CL1.1 77.91,26.25 76.87,27.29 73.68,27.29 Q2.1 73.54,27.42 57.96,27.42 37.08,48.3 | 37.08,48.3 20.36,65.03 20.36,65.37 U2.18 | 37.08,48.3 88.02,99.24 88.02,104.29 TP13.TP
EPD_BUSY  (via drill 0.3)
  Top 0.15: v84.83,14.68 84.83,15.79 J1.9 | v37.53,47.09 37.53,47.3 20.36,64.47 10.87,64.47 10.18,65.16 10.18,65.37 U2.26 10.11,65.44 10.11,66.69 12.6,69.18 12.6,70.01 TP9.TP
  Bottom 0.15: v84.83,14.68 84.48,14.68 83.52,13.71 70.98,13.71 41,43.7 41,43.91 37.81,47.09 v37.53,47.09
EPD_CS  (via drill 0.3)
  Top 0.15: v124.72,13.02 124.93,12.81 D6.2 | 126.59,14.54 126.8,14.54 127.42,15.17 TP10.TP | 126.59,14.54 v126.24,14.54 | 84.31,13.89 87.46,10.73 106.02,10.73 109.62,7.13 120.01,7.13 120.22,7.34 120.5,7.34 120.77,7.06 124.44,7.06 125,6.51 R9.1 125.07,6.51 125.62,7.06 129.43,7.06 129.77,7.41 129.77,8.24 129.64,8.38 128.87,8.38 126.59,10.66 126.59,14.54 | 84.31,13.89 83.31,14.89 83.31,15.79 J1.12 | v40.51,43.77 24.24,43.77 20.36,47.65 20.36,47.92 U2.11 | v84.28,13.85 84.31,13.89
  Bottom 0.15: v126.24,14.54 v124.72,13.02 | v40.51,43.77 70.84,13.44 83.86,13.44 v84.28,13.85
EPD_DC  (via drill 0.3)
  Top 0.15: v83.79,15.03 83.79,15.79 J1.11 | v60.04,25.9 26.8,25.9 10.66,42.04 TP11.TP 10.66,42.11 11.43,42.87 v11.43,43.28 | v12.67,44.53 U2.5
  Bottom 0.15: v83.79,15.03 82.61,15.03 81.85,14.27 71.67,14.27 v60.04,25.9 | v11.43,43.28 v12.67,44.53
EPD_RST  (via drill 0.3)
  Top 0.15: v97.23,19.81 90.09,12.67 86.22,12.67 84.35,14.54 84.35,15.79 J1.10 | v49.51,63.43 48.54,64.4 TP12.TP | v23.68,67.03 17.87,67.03 16.55,65.72 16.55,65.44 U2.21
  Bottom 0.15: v97.23,19.81 97.23,35.6 97.99,36.36 97.99,49.79 84.35,63.43 v49.51,63.43 49.44,63.43 45.84,67.03 v23.68,67.03
FLASH_CS  (via drill 0.3)
  Top 0.15: v120.36,6.86 120.7,6.51 121.19,6.51 R5.1 | v120.36,11.43 121.12,12.19 D9.2 | v31.02,57.62 33.31,59.9 35.94,59.9 U1.1 | v21.61,49.17 21.61,47.99 U2.12 | v65.37,57.62 v81.78,41.2
  Bottom 0.15: v120.36,6.86 v120.36,11.43 117.31,11.43 109.42,19.32 97.09,19.32 89.19,27.22 89.19,33.8 v81.78,41.2 | v21.61,49.17 30.05,57.62 v31.02,57.62 v65.37,57.62
GDR  (via drill 0.3)
  Top 0.15: v86.91,13.71 88.29,15.1 88.29,15.79 J1.2 | v66.97,15.1 66.34,15.72 Q3.1 66.27,15.72 64.89,14.34 63.57,14.34 R4.2
  Bottom 0.15: v86.91,13.71 85.39,12.19 69.87,12.19 v66.97,15.1
GND  (via drill 0.3)
  Top 0.15: J4.G3 1.25,81.09 1.25,87.88 4.71,91.34 J4.P6 4.85,91.41 4.71,91.41 2.29,93.83 2.29,94.18 J4.G4 2.29,94.25 8.24,100.21 9.14,100.21 C9.2 9.21,100.28 16.2,100.28 23.55,107.61 25.48,107.61 RESET_BUTTON.2 25.55,107.61 v26.38,106.78 | 49.86,100.69 49.38,100.21 47.64,100.21 IC1.3 | 49.86,100.69 51.94,100.69 C_DELAY.2 | v49.72,107.34 50,107.61 50.76,107.61 BOOT_BUTTON.2 | v49.72,100.9 49.86,100.76 49.86,100.69 | v64.96,107.89 65.16,107.69 66,107.69 CHANGE_BUTTON.2 | v46.33,98.82 44.67,97.16 TP4.TP 44.6,97.09 27.46,79.95 | U2.29_1 12.12,53.95 12.12,55.12 U2.29_2 12.19,55.12 13.3,55.12 U2.29_5 | U2.29_1 12.19,53.95 13.3,53.95 U2.29_4 13.37,53.95 14.54,53.95 U2.29_7 14.61,53.95 14.61,55.12 U2.29_8 14.61,55.19 14.61,56.37 U2.29_9 14.54,56.44 13.37,56.44 U2.29_6 13.3,56.44 12.12,56.44 U2.29_3 12.12,56.51 12.12,59.83 7.62,64.33 7.62,65.37 U2.28 7.62,65.44 7.62,67.17 15.44,75 15.44,84.07 J4.G1 15.51,84.14 15.51,85.18 16.34,86.01 16.34,87.26 | v7.62,49.45 7.62,47.99 U2.1 7.62,47.92 7.62,43.35 30.61,20.36 59.14,20.36 EPD_C2.1 59.21,20.29 59.21,17.31 62.19,14.34 R4.1 62.19,14.27 62.19,10.53 61.56,9.9 SJ1.1 61.56,9.84 61.56,9.7 62.39,8.87 63.78,8.87 64.26,9.35 65.16,9.35 R2.1 65.23,9.42 69.8,9.42 73.75,13.37 76.17,13.37 J1.MP2 76.24,13.37 76.24,14.54 | v10.94,52.77 12.05,53.88 U2.29_1 | U1.9 39.89,58.03 38.02,56.16 36.01,56.16 U1.4 36.01,56.23 36.01,56.44 34.9,57.55 34.9,58.59 35.8,59.49 36.49,59.49 36.7,59.69 36.7,70.7 27.46,79.95 | 16.34,87.26 16.34,88.92 15.51,89.75 J4.G2 | 27.46,79.95 20.15,87.26 16.34,87.26 | C1_BAT2.2 128.25,43.98 125.97,43.98 125.14,44.81 C3.- 125.07,44.88 124.03,44.88 v123.33,45.57
  Top 0.15: 123.33,48.68 120.91,48.68 115.23,54.36 C1_BAT.2 | 123.33,48.68 124.1,48.68 R2_BAT.1 | 123.33,48.68 v123.33,48.06 | J2.B12 162.53,50.83 162.53,50.55 J2.A1 162.53,50.48 162.53,49.31 163.01,48.82 J2.MP3 163.08,48.82 165.02,48.82 | 165.02,48.82 166.96,48.82 J2.MP1 | 165.02,59 163.08,59 J2.MP4 163.01,58.93 162.53,58.45 162.53,57.27 J2.A12 162.53,57.2 162.53,56.99 J2.B1 162.46,56.92 153.11,56.92 152.21,56.02 R2-USB.2 152.14,55.95 150.9,55.95 147.16,52.22 146.88,52.22 D1.2 | 165.02,59 166.96,59 J2.MP2 | 165.02,59 165.02,48.82 | U4.4 134.28,56.02 134.62,56.02 135.18,56.58 135.18,56.72 U4.9 | U4.9 135.25,56.79 134.62,57.41 134.28,57.41 U4.1 134.21,57.48 133.93,57.76 126.52,57.76 C2_BAT.2 126.45,57.96 126.45,57.76 125.14,56.44 125.14,53.46 125.69,52.91 125.9,52.91 MCP73831.2 125.41,53.12 v125,52.7 | U4.9 135.18,56.51 136.22,56.51 U4.6 136.28,56.44 139.12,56.44 R2-USB1.1 142.03,53.53 144.39,53.53 145.7,52.22 146.81,52.22 D1.2 | C5_USB.2 149.23,47.58 149.23,49.31 C4_USB.2 149.23,49.45 v149.23,50.48 | v147.85,51.87 147.36,52.35 D1.2 | C1.2 157.41,6.3 156.16,6.3 C2.2 156.37,6.37 156.37,9.14 | SENSOR2.5 158.51,9.97 158.51,10.11 157.96,10.66 157.41,10.66 156.92,10.18 156.92,9.97 SENSOR2.7 156.85,9.9 156.85,9.63 156.37,9.14 | 156.37,9.14 155.81,9.14 155.6,9.35 155.6,11.01 156.09,11.5 156.09,12.81 SENSOR2.1 156.16,12.88 156.16,13.3 v156.57,13.71 | 110.87,10.73 113.92,10.73 D11.1 113.99,10.73 117.45,10.73 D10.1 117.52,10.73 121.12,10.73 D9.1 121.19,10.73 124.1,10.73 | 110.87,10.73 110.18,10.73 D12.1 | 124.1,10.73 124.93,10.73 D6.1 | v127.07,10.8 128.94,10.8 D8.1 129.01,10.8 135.87,17.66 156.57,17.66
  Top 0.15: v124.1,10.8 124.1,10.73 | 156.57,17.66 164.95,17.66 J3.1 | v156.57,17.59 156.57,17.66 | v94.53,45.84 94.39,45.71 93.69,45.71 C8.2 | v96.74,43.63 99.65,43.63 C10_SUPERCAP.1 99.58,43.56 99.58,35.73 100.27,35.04 C7.2 | v85.94,46.26 85.94,44.88 U3.13 | 116.62,44.04 117.03,44.04 117.45,44.46 IC4.2 | 116.62,44.04 116.55,44.04 | 116.55,44.04 114.54,44.04 114.33,43.84 113.22,43.84 R1_PWRUSB.1 113.15,43.77 108.93,43.77 104.91,39.75 TP5.TP 104.84,39.68 104.84,39.54 100.34,35.04 100.34,34.83 C7.2 | 116.55,44.04 116.55,41.48 C1_BAT1.2 | J1.MP1 89.75,13.3 87.12,13.3 87.05,13.23 86.15,13.23 85.32,14.06 85.32,15.79 J1.8 85.32,15.86 85.32,16.2 87.81,18.7 EPD_C6.1 88.29,18.77 90.37,18.77 EPD_C5.1 | EPD_C1.1 93.21,18.28 90.86,18.28 90.44,18.7 EPD_C5.1 | EPD_C5.1 90.37,18.84 91.13,19.6 91.13,20.43 90.92,20.64 87.6,20.64 86.91,19.95 86.91,19.25 86.36,18.7 85.73,18.7 EPD_C7.1 85.66,18.7 83.79,18.7 EPD_C8.1 83.72,18.77 81.85,18.77 EPD_C9.1 81.78,18.77 79.71,18.77 EPD_C10.1 79.92,18.7 v79.92,18.01 | 76.24,17.66 76.24,18.07 75.69,18.63 EPD_C12.1 | 76.24,17.66 76.24,14.54 | 76.24,14.54 79.92,14.54 80.75,15.38 80.75,15.79 J1.17 | v77.28,17.94 77.63,18.28 77.63,18.63 EPD_C11.1 | v76.31,17.66 76.24,17.66 | v76.73,34.77 77.91,35.94 77.91,37.47 D3.1 | 110.87,10.73 110.87,24.24 100.34,34.77 C7.2 | v116.62,44.11 116.62,44.04
  Bottom 0.15: v49.72,107.34 v49.72,100.9 49.65,100.9 47.58,98.82 v46.33,98.82 | v64.96,107.89 64.96,108.58 63.99,109.56 52.01,109.56 49.79,107.34 v49.72,107.34 | v10.94,52.77 v7.62,49.45 | v26.38,106.78 44.53,106.78 44.94,107.2 49.65,107.2 v49.72,107.34 | v147.85,51.87 v149.23,50.48 | v125,52.7 123.33,51.04 v123.33,48.06 v123.33,45.57 118.07,45.57 v116.62,44.11 | v124.1,10.8 v127.07,10.8 | v156.57,17.59 v156.57,13.71 | v96.74,43.63 v94.53,45.84 94.46,45.84 94.04,46.26 v85.94,46.26 85.94,45.98 76.73,36.77 v76.73,34.77 76.73,31.09 76.94,30.89 76.94,17.94 | 76.94,17.94 76.59,17.94 v76.31,17.66 | 76.94,17.94 v77.28,17.94 77.28,18.01 v79.92,18.01
  pour Top: 73.96,9.91 73.98,9.93 92.22,9.93 92.24,9.91 92.26,9.89 92.28,9.87 92.28,0.08 170.12,0.08 170.12,67.12 92.18,67.12 92.16,67.14 92.14,67.16 92.12,67.18 92.12,111.12 69.08,111.12 69.08,109.93 69.06,109.91 69.04,109.89 69.02,109.87 19.98,109.87 19.96,109.89 19.94,109.91 19.92,109.93 19.92,111.12 0.08,111.12 0.08,66.98 6.37,66.98 6.39,66.96 6.41,66.94 6.43,66.92 6.43,46.18 6.41,46.16 6.39,46.14 6.37,46.12 0.08,46.12 0.08,0.08 73.92,0.08 73.92,9.87 73.94,9.89
  pour Bottom: 6.41,46.16 6.39,46.14 6.37,46.12 0.08,46.12 0.08,0.08 73.92,0.08 73.92,9.87 73.94,9.89 73.96,9.91 73.98,9.93 92.22,9.93 92.24,9.91 92.26,9.89 92.28,9.87 92.28,0.08 170.12,0.08 170.12,67.12 92.18,67.12 92.16,67.14 92.14,67.16 92.12,67.18 92.12,111.12 69.08,111.12 69.08,109.93 69.06,109.91 69.04,109.89 69.02,109.87 19.93,109.87 19.91,109.89 19.89,109.91 19.87,109.93 19.87,111.12 0.08,111.12 0.08,66.98 6.37,66.98 6.39,66.96 6.41,66.94 6.43,66.92 6.43,46.18
GPIO8  (via drill 0.3)
  Top 0.15: v18.56,42.66 18.63,42.66 19.25,42.04 R1.1 | v18.56,46.81 18.56,47.51 18.97,47.92 U2.10
  Bottom 0.15: v18.56,46.81 v18.56,42.66
I2C_PW  (via drill 0.3)
  Top 0.15: C1.1 157.41,4.99 156.16,4.99 C2.1 156.09,4.99 v104.15,4.99 | v37.05,49.1 37.05,49.72 21.61,65.16 21.61,65.37 U2.17
  Bottom 0.15: v104.15,4.99 94.94,14.2 85.25,14.2 84.21,13.16 70.5,13.16 37.05,46.61 v37.05,49.1
IC2_PW
  Top 0.15: R1_PINH.2 160.11,6.3 158.86,6.3 R2_PINH.2 158.86,6.37 157.75,7.48 157.75,9.9 SENSOR2.6
INT_RTC  (via drill 0.3)
  Top 0.15: v90.44,54.85 93.63,54.85 R1_PINH1.1 93.76,54.85 v94.39,55.47 | v87.6,55.54 87.6,54.57 U3.3 87.12,54.09 87.12,53.39 86.01,52.28 v86.01,50.35 | v17.38,46.81 16.55,47.65 16.55,47.92 U2.8 | v96.33,57.41 106.44,57.41 TP15.TP
  Bottom 0.15: v90.44,54.85 88.29,54.85 v87.6,55.54 | v17.38,46.81 17.94,46.81 19.25,48.13 35.46,48.13 36.91,49.58 47.23,49.58 52.15,44.67 80.33,44.67 v86.01,50.35 | v94.39,55.47 v96.33,57.41
IO/BOOT  (via drill 0.3)
  Top 0.15: 45.15,106.85 51.59,106.85 52.22,107.48 R_BOOT.1 | 45.15,106.85 45.01,106.99 45.01,109.14 45.22,109.35 47.09,109.35 47.23,109.21 BOOT_BUTTON.4 | v24.17,82.62 24.17,65.44 U2.15 | v45.08,106.72 45.15,106.78 45.15,106.85
  Bottom 0.15: v24.17,82.62 24.17,85.8 v45.08,106.72
IO/CHANGE  (via drill 0.3)
  Top 0.15: R_CHANGE.1 67.59,107.48 67.59,107.61 66.83,108.38 63.29,108.38 62.53,109.14 CHANGE_BUTTON.4 62.46,109.21 62.26,109.42 60.32,109.42 v59.97,109.07 | v23.68,75.41 13.99,65.72 13.99,65.44 U2.23
  Bottom 0.15: v23.68,75.41 26.32,75.41 v59.97,109.07
MISO  (via drill 0.3)
  Top 0.15: v3.95,93.28 4.71,92.52 5.05,92.52 J4.P7 | v3.95,99.03 3.95,99.38 3.19,100.14 TP6.TP | v109.28,6.86 109.62,6.51 110.11,6.51 R8.1 | v109.28,11.29 110.11,12.12 D12.2 110.11,12.19 110.11,23.89 v97.5,36.5 | v35.39,58.1 35.94,58.66 U1.2 36.01,58.73 36.15,58.73 36.77,59.35 v36.98,59.35 | v17.17,58.1 15.93,58.1 8.93,65.1 8.93,65.37 U2.27 8.79,65.44 8.79,65.79 8.1,66.48 v8.1,67.03
  Bottom 0.15: v3.95,99.03 v3.95,93.28 3.95,87.53 3.39,86.98 3.39,71.74 v8.1,67.03 | v109.28,11.29 v109.28,6.86 | v17.17,58.1 v35.39,58.1 | v97.5,36.5 97.5,49.86 88.02,59.35 v36.98,59.35
MOSI  (via drill 0.3)
  Top 0.15: v113.08,6.65 113.29,6.44 R7.1 | v113.08,11.36 113.92,12.19 D11.2 | v82.34,16.62 82.34,15.86 J1.14 | v87.39,32.13 87.39,33.03 89.89,35.53 89.89,38.23 TP7.TP | v42.66,56.16 43.77,56.16 U1.5 | v17.11,49.03 16.07,49.03 15.23,48.2 15.23,47.99 U2.7 | v4.36,87.33 5.05,88.02 J4.P3 | v77.7,28.6 69.87,28.6 v53.05,45.43
  Bottom 0.15: v113.08,6.65 v113.08,11.36 109.83,11.36 102.14,19.05 88.78,19.05 87.53,20.29 85.59,20.29 | v82.34,16.62 82.96,16.62 85.59,19.25 85.59,20.29 | 85.59,28.6 85.59,30.33 v87.39,32.13 | 85.59,28.6 85.59,20.29 | v4.36,87.33 4.36,76.52 16.2,64.68 16.2,50 17.11,49.1 v17.11,49.03 17.45,48.68 21.74,48.68 22.09,49.03 22.09,49.24 29.57,56.72 42.1,56.72 v42.66,56.16 42.66,55.82 v53.05,45.43 | v77.7,28.6 85.59,28.6
N$1
  Top 0.15: R2-USB.1 152.21,54.71 161.01,54.71 161.91,55.61 162.46,55.61 J2.B5
N$2  (via drill 0.3)
  Top 0.15: v144.94,52.35 142.03,52.35 R2-USB1.2 | v161.56,52.35 161.84,52.63 162.46,52.63 J2.A5
  Bottom 0.15: v161.56,52.35 v144.94,52.35
N$3  (via drill 0.3)
  Top 0.15: D2.1 115.09,43.35 115.23,43.21 115.23,41.48 C1_BAT1.1 115.3,41.41 115.44,41.41 116.13,40.72 116.96,40.72 117.45,41.2 117.45,43.49 IC4.3 117.52,43.56 117.93,43.98 118,43.98 118.14,44.11 118.14,44.88 | 118.14,44.88 117.52,45.5 IC4.1 | v131.02,49.45 132.13,49.45 Q1.2 | v118.28,44.94 118.21,44.88 118.14,44.88
  Bottom 0.15: v131.02,49.45 127.83,49.45 123.33,44.94 v118.28,44.94
N$4  (1 unrouted)
N$5  (via drill 0.3)
  Top 0.15: C4.1 95.77,30.82 90.23,30.82 89.61,30.19 D4.1 89.75,30.4 v88.71,31.44 | v82.68,37.47 81.44,37.47 D3.2
  Bottom 0.15: v88.71,31.44 v82.68,37.47
N$6  (1 unrouted)
N$7
  Top 0.15: SENSOR2.8 156.16,9.97 156.16,11.15 156.85,11.84 156.85,12.81 SENSOR2.2
N$8
  Top 0.15: R2_BAT.2 124.17,50 124.17,50.62 124.65,51.11 124.65,51.38 124.17,51.87 123.4,51.87 MCP73831.5
N$9
  Top 0.15: J1.24 77.28,15.86 77.28,17.31 76.52,18.07 76.52,19.11 75.69,19.95 EPD_C12.2
N$10  (via drill 0.3)
  Top 0.15: v124.17,51.25 122.85,51.25 120.91,53.19 120.7,53.19 R1_BAT.2 | v126.1,51.25 126.1,51.73 125.97,51.87 MCP73831.1
  Bottom 0.15: v126.1,51.25 v124.17,51.25
N$11
  Top 0.15: CHG_LED.C 119.25,54.43 119.25,53.39 R1_BAT.1
N$12
  Top 0.15: C_DELAY.1 51.94,102.01 50.55,102.01 50.48,102.08 IC1.5
N$13  (via drill 0.3)
  Top 0.15: v78.39,19.32 78.32,19.25 78.32,15.86 J1.22 | v78.94,20.64 79.08,20.64 79.64,20.08 EPD_C10.2
  Bottom 0.15: v78.39,19.32 78.39,20.08 v78.94,20.64
N$14  (via drill 0.3)
  Top 0.15: v89.19,57.55 88.92,57.27 88.92,56.72 R_CAPACITOR.1 | v88.02,58.73 88.02,59.42 88.29,59.69 D7.1
  Bottom 0.15: v88.02,58.73 v89.19,57.55
N$15  (via drill 0.3)
  Top 0.15: v79.29,16.97 79.29,15.86 J1.20 | v83.03,19.32 83.72,20.01 EPD_C8.2
  Bottom 0.15: v79.29,16.97 79.5,16.97 81.85,19.32 v83.03,19.32
N$16  (via drill 0.3)
  Top 0.15: v79.78,16.62 79.78,15.86 J1.19 | v86.36,19.32 85.73,19.95 EPD_C7.2
  Bottom 0.15: v79.78,16.62 79.78,15.65 79.29,15.17 79.29,14.89 79.64,14.54 81.72,14.54 86.36,19.18 v86.36,19.32
N$18
  Top 0.15: R_RESET.1 27.01,107.55 27.01,107.69 26.32,108.38 22.78,108.38 22.02,109.14 RESET_BUTTON.4
N$19  (via drill 0.3)
  Top 0.15: v79.78,15.03 79.84,15.03 80.26,15.44 80.26,15.79 J1.18 | v87.39,19.81 88.09,19.81 88.22,19.95 EPD_C6.2
  Bottom 0.15: v79.78,15.03 81.78,15.03 85.87,19.11 85.87,19.46 86.22,19.81 v87.39,19.81
N$20
  Top 0.15: J1.4 87.32,15.86 87.32,16.2 88.02,16.9 93.21,16.9 EPD_C1.2
N$21
  Top 0.15: J1.15 81.85,15.86 81.85,16.76 83.17,18.07 86.49,18.07 87.81,19.39 89.75,19.39 90.37,20.01 EPD_C5.2
N$22  (via drill 0.3)
  Top 0.15: v86.36,15.03 86.77,15.44 86.77,15.79 J1.5 | v63.71,21.61 59.21,21.61 EPD_C2.2
  Bottom 0.15: v86.36,15.03 85.11,15.03 84.97,15.17 84.55,15.17 83.38,13.99 71.33,13.99 v63.71,21.61
N$23
  Top 0.15: C6.2 45.77,107.48 47.09,107.48 47.23,107.61 BOOT_BUTTON.1
N$24
  Top 0.15: C5.2 20.71,108.79 20.84,108.79 21.95,107.69 RESET_BUTTON.1
N$25
  Top 0.15: C6.1 45.77,108.72 46.19,108.72 46.54,108.38 50,108.38 50.76,109.14 BOOT_BUTTON.3
N$26  (via drill 0.3)
  Top 0.15: v21.33,106.72 20.71,107.34 20.71,107.48 C5.1 | v23.75,109.14 25.48,109.14 RESET_BUTTON.3
  Bottom 0.15: v23.75,109.14 v21.33,106.72
PREVGL  (via drill 0.3)
  Top 0.15: J1.21 78.81,15.79 78.81,15.44 78.6,15.24 78.05,15.24 77.84,15.44 77.84,15.79 J1.23 77.77,15.86 v77.77,16.62 | v76.45,19.81 76.59,19.95 77.63,19.95 EPD_C11.2 | v91,28.12 93,30.12 D4.2 | v89.96,27.08 89.96,26.73 89.54,26.32 D5.1 89.47,26.25 88.85,26.25 82.61,20.01 81.85,20.01 EPD_C9.2 81.78,20.08 78.74,23.13 v76.45,23.13
  Bottom 0.15: v77.77,16.62 76.73,16.62 75.83,17.52 75.83,17.8 76.45,18.42 v76.45,19.81 v76.45,23.13 | v89.96,27.08 v91,28.12
RESE  (via drill 0.3)
  Top 0.15: v86.28,13.71 87.81,15.24 87.81,15.79 J1.3 | v71.95,12.67 71.05,13.57 R3.2 70.98,13.64 68.9,15.72 67.66,15.72 Q3.2
  Bottom 0.15: v86.28,13.71 85.18,13.71 84.14,12.67 v71.95,12.67
RESE'
  Top 0.15: SJ1.2 63.09,9.9 63.85,10.66 65.16,10.66 R2.2 65.23,10.73 68.07,13.57 69.67,13.57 R3.1
RESET  (via drill 0.3)
  Top 0.15: v46.81,102.49 47.16,102.14 47.58,102.14 IC1.1 | v16.69,54.92 11.36,49.58 11.29,49.58 10.18,48.48 10.18,47.99 U2.3
  Bottom 0.15: v46.81,102.49 46.81,99.93 16.69,69.81 v16.69,54.92
RTC_RST  (via drill 0.3)
  Top 0.15: v43.56,55.54 32.48,55.54 22.85,65.16 22.85,65.37 U2.16 | v85.8,52.7 85.8,54.02 85.87,54.09 U3.4
  Bottom 0.15: v43.56,55.54 82.96,55.54 v85.8,52.7
RX
  Top 0.15: U2.24 12.74,65.44 12.74,68.42 19.6,75.28 19.6,86.01 TP2.TP
SCK  (via drill 0.3)
  Top 0.15: v41.97,56.23 43.14,57.41 43.77,57.41 U1.6 | v23.61,50.14 15.93,50.14 13.99,48.2 13.99,47.99 U2.6 | v3.88,76.59 3.88,89.61 4.5,90.23 5.05,90.23 J4.P5 | v116.75,6.65 116.96,6.44 117.59,6.44 R6.1 | v116.69,11.43 117.45,12.19 D10.2 | v82.82,17.11 82.82,16.62 | 82.82,16.62 82.82,15.86 J1.13 | v77.21,36.63 77.21,36.91 75.41,38.71 75.41,45.84 TP8.TP 75.34,45.91 v51.94,45.91 | 82.82,16.62 v84.42,16.62
  Bottom 0.15: v3.88,76.59 15.93,64.54 15.93,49.58 17.11,48.41 21.95,48.41 23.61,50.07 v23.61,50.14 29.71,56.23 v41.97,56.23 41.97,55.89 v51.94,45.91 | v116.69,11.43 116.75,11.36 v116.75,6.65 113.71,6.65 113.22,6.16 104.22,6.16 93.76,16.62 v84.42,16.62 | v82.82,17.11 82.82,18.49 83.52,19.18 83.52,22.16 77.21,28.46 v77.21,36.63
SCL  (via drill 0.3)
  Top 0.15: R2_PINH.1 158.86,4.92 159.14,4.92 159.69,4.36 160.66,4.36 161.15,4.85 161.15,10.18 158.51,12.81 SENSOR2.4 158.51,12.88 v158.51,15.03 | v138.29,56.92 136.28,56.92 U4.7 | v162.81,32.41 162.81,22.85 164.95,20.71 J3.4 | v18.63,66.55 17.8,65.72 17.8,65.44 U2.20 | v90.44,44.11 89.75,44.81 U3.16 | v97.02,48.96 v98.27,50.21
  Bottom 0.15: v158.51,15.03 158.51,28.05 162.81,32.34 v162.81,32.41 v138.29,56.92 104.98,56.92 v98.27,50.21 | v18.63,66.55 19.25,66.55 19.74,67.03 23.06,67.03 31.23,58.86 87.05,58.86 96.98,48.93 | 96.98,48.93 97.23,48.68 97.23,43.49 96.88,43.14 91.41,43.14 v90.44,44.11 | v97.02,48.96 96.98,48.93
SDA  (via drill 0.3)
  Top 0.15: R1_PINH.1 160.18,4.99 160.18,5.12 160.87,5.82 160.87,9.42 157.75,12.54 157.75,12.81 SENSOR2.3 157.75,12.88 157.75,14.89 v159.34,16.48 | v137.95,57.41 136.28,57.41 U4.8 136.22,57.48 135.87,57.48 128.25,65.1 92.45,65.1 v84.9,57.55 | v162.32,33.52 162.32,22.02 164.61,19.74 164.95,19.74 J3.3 | v19.88,66.55 19.04,65.72 19.04,65.44 U2.19 | v95.77,45.22 95.63,45.22 93.97,43.56 89.4,43.56 88.5,44.46 88.5,44.81 U3.15
  Bottom 0.15: v137.95,57.41 138.43,57.41 144.46,51.38 144.46,51.18 162.11,33.52 v162.32,33.52 162.39,33.52 163.29,32.62 163.29,32.27 159.34,28.32 v159.34,16.48 | v19.88,66.55 23.13,66.55 31.09,58.59 83.79,58.59 84.87,57.51 | 84.87,57.51 95.77,46.61 v95.77,45.22 | v84.9,57.55 84.87,57.51
SRC  (via drill 0.3)
  Top 0.15: C4.2 95.77,29.5 95.77,29.09 93,26.32 D5.2 92.93,26.32 92.1,26.32 86.63,31.79 v86.63,31.99 | v67.03,21.33 67.03,17.94 Q3.3 | 79.71,34 v76.45,30.75 | 79.71,34 L1.1 | v80.05,33.73 79.78,34 79.71,34
  Bottom 0.15: v76.45,30.75 v67.03,21.33 | v86.63,31.99 81.78,31.99 v80.05,33.73
SS_SD  (via drill 0.3)
  Top 0.15: v128.25,6.51 129.01,6.51 R10.1 | v128.25,11.5 129.01,12.26 D8.2 | v11.43,49.1 11.43,47.99 U2.4 | v6.09,73.75 6.09,86.42 5.54,86.98 J4.P2 | v86.91,11.91 v97.85,11.91
  Bottom 0.15: v128.25,11.5 v128.25,6.51 120.63,6.51 120.01,5.89 103.88,5.89 v97.85,11.91 | v6.09,73.75 11.43,68.42 v11.43,49.1 11.49,49.1 48.68,11.91 v86.91,11.91
TX  (via drill 0.3)
  Top 0.15: v10.6,66.55 11.36,65.79 11.36,65.44 U2.25 | v4.5,69.25 3.53,69.25 3.19,69.6 TP1.TP
  Bottom 0.15: v10.6,66.55 7.2,66.55 v4.5,69.25
USB_D+  (via drill 0.3)
  Top 0.15: v39.89,50.35 54.91,65.37 132.96,65.37 145.15,53.19 146.81,53.19 D1.1 | v24.93,48.75 24.17,47.99 U2.14
  Bottom 0.15: v39.89,50.35 26.52,50.35 v24.93,48.75
USB_D-  (via drill 0.3)
  Top 0.15: v144.94,51.31 146.81,51.31 D1.3 | v87.53,60.87 51.04,60.87 v41,50.83 | v23.75,49.1 22.85,48.2 22.85,47.99 U2.13
  Bottom 0.15: v144.94,51.31 135.38,60.87 v87.53,60.87 | v41,50.83 25.48,50.83 v23.75,49.1
VBAT
  Top 0.3: U4.2 134.28,56.92 134.28,56.51 U4.3 134.14,56.44 133.79,56.44 131.23,53.88 131.23,51.8 Q1.3 | Q1.3 131.16,51.66 128.46,51.66 126.31,53.81 125.97,53.81 MCP73831.3 126.45,53.88 126.45,56.65 C2_BAT.1 | TP3.TP 138.01,46.05 137.05,46.05 131.37,51.73 Q1.3
VBUS
  Top 0.3: D1.5 149.3,52.15 148.89,52.15 147.99,51.25 147.99,49.52 C4_USB.1 147.92,49.31 147.92,47.58 C5_USB.1 147.85,47.37 147.85,46.81 | 147.85,46.81 151.24,43.42 PFMF.050.1.2 | 113.99,45.15 114.75,45.15 115.02,45.43 D2.2 | 113.99,45.15 113.22,45.15 R1_PWRUSB.2 | 114.75,55.19 113.99,54.43 C1_BAT.1 113.99,54.29 113.99,45.15 | 114.75,55.19 120.01,55.19 120.63,54.57 CHG_LED.A 120.77,54.43 122.78,54.43 123.33,53.88 MCP73831.4 123.33,53.67 123.33,53.25 127.07,49.52 130.19,49.52 Q1.1 130.33,49.38 135.04,44.67 138.57,44.67 140.65,46.74 147.71,46.74 147.85,46.81 | TP14.TP 114.26,63.85 114.26,55.75 114.68,55.33 114.75,55.19
VRTC
  Top 0.3: 89.06,47.16 89.06,55.19 90.09,56.23 90.09,56.65 R_CAPACITOR.2 | 89.06,47.16 87.19,45.29 87.19,44.88 U3.14 | 89.06,47.16 89.19,47.09 91.89,44.39 93.63,44.39 C8.1 93.83,44.39 95.22,45.77 99.65,45.77 C10_SUPERCAP.2
VUSB
  Top 0.3: J2.A9 162.53,56.44 162.53,56.16 J2.B4 162.67,56.09 163.15,56.09 163.36,55.89 163.36,51.87 163.15,51.66 162.67,51.66 J2.B9 162.53,51.59 162.53,51.38 J2.A4 162.39,51.31 161.84,51.31 155.81,45.29 155.81,43.42 PFMF.050.1.1